# Altium PCB Laser_Driver.PcbDoc
Units mil, origin at the board's own origin, x right, y up, seen from the top; angles counter-clockwise.
Board outline 870.08 x 837.6 mil, 2 copper layers (Top Layer, Bottom Layer); 11 components, 9 nets, 33 pads, 25 vias.
Unrouted connection lines stored in the file: 8.
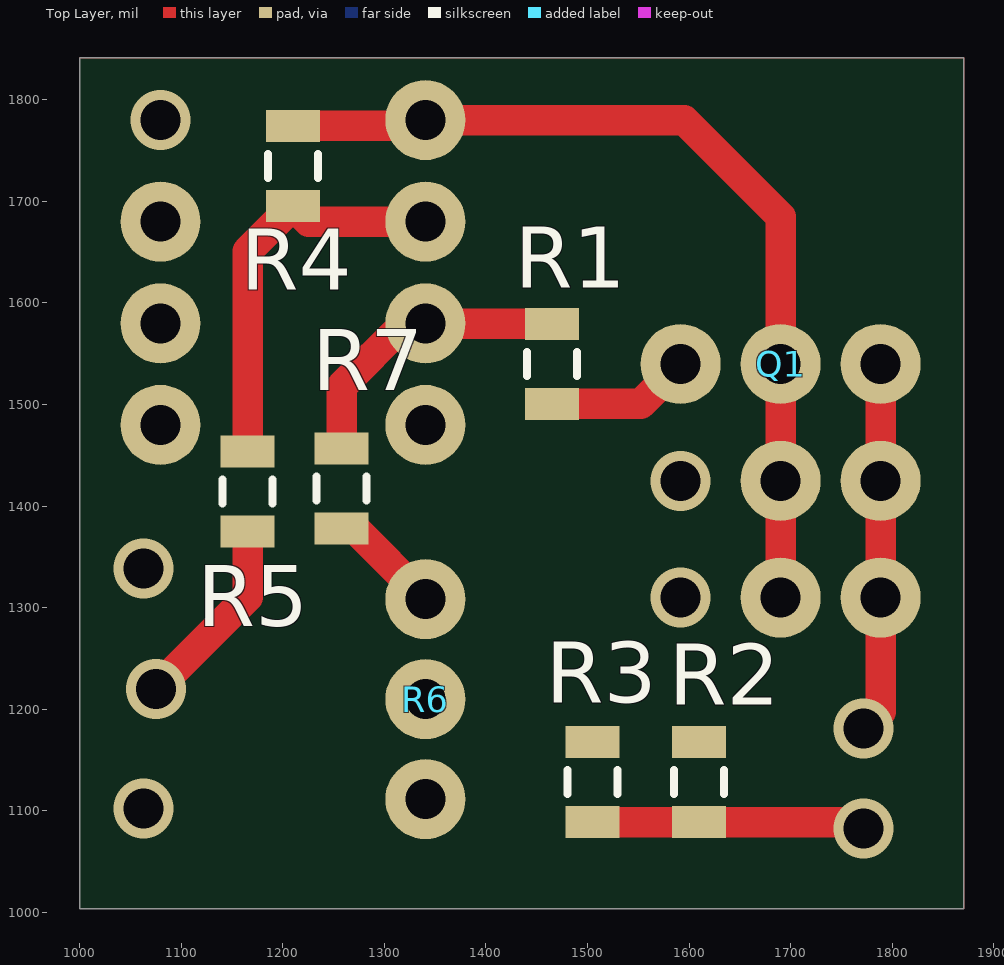
[diagram p0: Top Layer view]
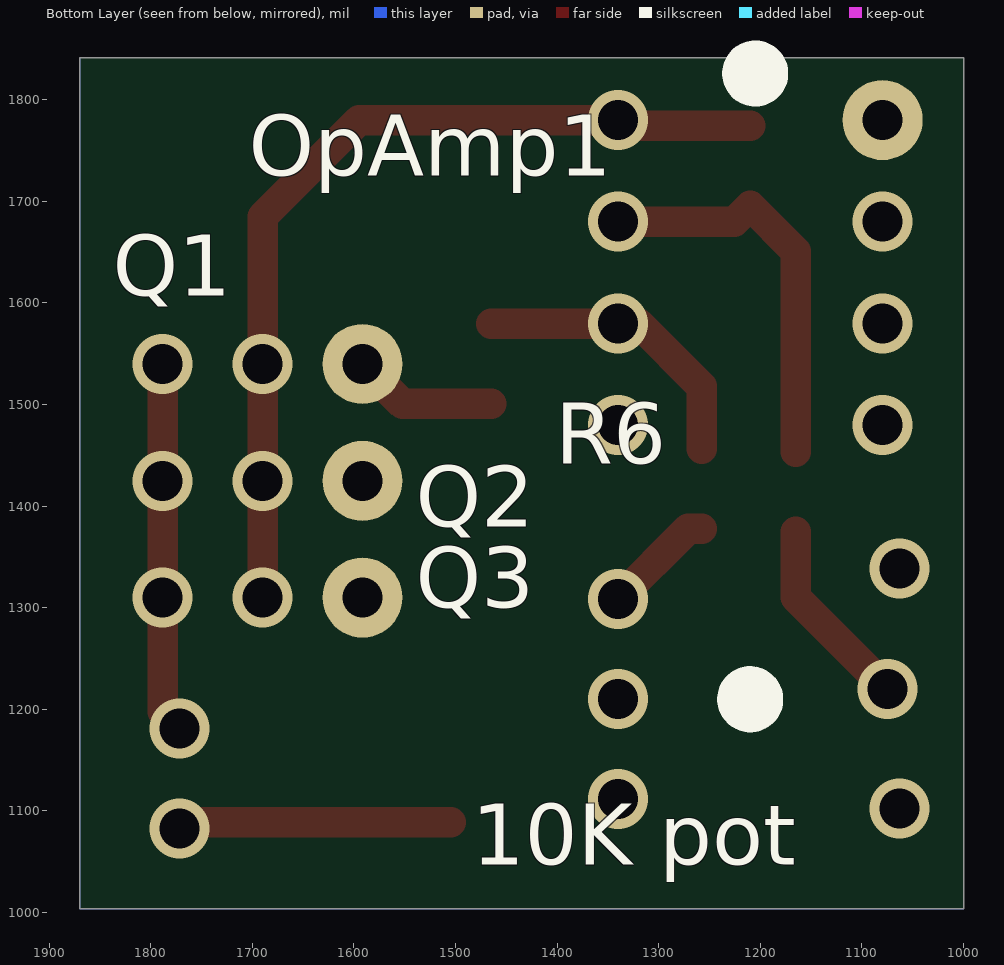
[diagram p1: Bottom Layer view, seen from below]

## Layer stack, top to bottom
Top Solder: solder mask 0.4, Solder Resist, Dk 3.5
Top Layer: signal copper 1.4
Dielectric 1: dielectric 12.6, FR-4, Dk 4.8
Bottom Layer: signal copper 1.4
Bottom Solder: solder mask 0.4, Solder Resist, Dk 3.5

## Board outline
1000,1003.94 1000,1841.54 1870.08,1841.54 1870.08,1003.94

## Design rules (kind name [scope] priority, off if disabled: settings)
Clearance [All] p1: gap=10
PlaneClearance [All] p1: clearance=40
PlaneConnect [All] p1: planeconnectstyle=Direct reliefexpansion=20 reliefentries=4 reliefconductorwidth=10 reliefairgap=10
PolygonConnect [All] p1: connectstyle=Direct reliefconductorwidth=10 reliefentries=4 polygonreliefangle="90 Angle" airgapwidth=10
RoutingVias [All] p1: holewidth=30 width=50 viastyle="Through Hole" minholewidth=30 minwidth=50 maxholewidth=30 maxwidth=50
SolderMaskExpansion [All] p1: expansion=4
Width [All] p1: maxlimit=50 minlimit=10 preferedwidth=10 minimp=50.000000 maximp=50.000000 favimp=50.000000
27 further rules are at their usual default settings.

## Components (designator, comment, footprint, x,y, rotation, side; value= is the part's Value field where it differs from the comment)
OpAmp1 "LF-353N" "6 pin socket" 1210,1630 r270 bottom
Q1 "" "NPN SOCKET"#1 1690,1540 r0 bottom
Q2 "" "NPN SOCKET"#2 1690,1425 r0 bottom
Q3 "" "NPN SOCKET"#2 1690,1310 r0 bottom
R1 "Resistor 22K 0804" "SMT 0805 (2012)" 1465,1540 r90 top
R2 "Resistor 22K 0804" "SMT 0805 (2012)" 1609.61,1128.46 r90 top
R3 "Resistor 22K 0804" "SMT 0805 (2012)" 1504.61,1128.46 r90 top
R4 "Resistor 22K 0804" "SMT 0805 (2012)" 1210,1735 r90 top
R5 "Resistor 56K Ohm" "SMT 0805 (2012)" 1165.35,1414.37 r270 top
R6 "10K pot" "pot socket" 1210,1210 r270 bottom
R7 "Resistor 500 0804" "SMT 0805 (2012)" 1257.87,1417.32 r270 top

## Footprints (in the part's own frame and the unit in brackets; to place one, negate y for a bottom-side part, rotate by r counter-clockwise, add the part's x,y. Pads: shape width x height; smd on the part's side, far side on the other; paste and mask are expansions set on the pad)
"6 pin socket" [mm] "6 pin socket"
  round 2 smd far side: 1(-3.81,-3.31) 2(-1.27,-3.31) 3(1.27,-3.31) 4(3.81,-3.31) 5(3.81,3.31) 6(1.27,3.31) 7(-1.27,3.31)
  round 2 smd: 8(-3.81,3.31)
  silkscreen extent -5.3,-0.2 -4.65,0.45, body extent -5,-5 5,5, height 8.5
"NPN SOCKET"#1 [mm] "NPN socket"
  round 2 smd far side: 1(-2.5,0) 2(0,0) 3(2.5,0)
  body extent -3.8,-1.3 3.8,1.3, height 14
"NPN SOCKET"#2 [mm] "NPN socket"
  round 2 smd: 1(-2.5,0)
  round 2 smd far side: 2(0,0) 3(2.5,0)
  body extent -3.8,-1.3 3.8,1.3, height 14
"pot socket" [mm] "pot socket"
  round 2 smd far side: 1(-2.5,-3.31) 2(0,-3.31) 3(2.5,-3.31)
  silkscreen extent -0.33,-0.33 0.33,0.33, body extent -5,-5 5,5, height 14
"SMT 0805 (2012)" [mm] "SMT 0805(2012)"
  rect 0.8x1.35 smd: 1(-1,0) 2(1,0)
  silkscreen extent -0.3,-0.63 0.3,0.63, body extent -1,-0.63 1,0.63, height 0.8

## Part data
OpAmp1: library part LF353NFS-ND
Q1 Q2 Q3: library part MMBT3904, "NPN Bipolar Transistor"
R1 R2 R3 R4: "Resistor 22K 1% Surface Mount 0804"
R5: library part "Resistor 56k Ohm 0804", "Resistor 56K 0804"
R7: library part "Resistor 22K 0804", "Resistor 22K 1% Surface Mount 0804"

## Free pads (board coordinates)
  round 78.74 smd far side: 1(1591.57,1540)

## Via types
v1: diameter 59.06, hole 39.37, Top Layer to Bottom Layer, 25 vias

## Nets (pads, with @x,y where several pads share a name; then routed paths per layer and width w, separated by ;. In a path a pad name is that pad's centre, name@x,y a point inside that pad or via, vN(x,y) a via of type N, cw(c..) or ccw(c..) an arc to the next point about the centre after c; other vN are vias at no path point)
12V: OpAmp1.8 pad.1 Q1.1 Q2.1 Q3.1 R1.1 | length 142.9
  Top Layer w30: R1.1 1552.2,1500.63 v1(1591.57,1540)
  other v1: 1591.57,1310 1062.99,1338.58 1591.57,1425 1079.68,1780
GND: OpAmp1.4 R2.2 R3.2 R6.2
  other v1: 1062.99,1102.36 1340.32,1210 1340.32,1480
IN: R5.2 | length 192.4
  Top Layer w30: v1(1075,1220) 1165.35,1310.35 R5.2
LASER_IN: Q1.3 Q2.3 Q3.3 | length 365.8
  Top Layer w30: v1(1771.65,1181.1) 1788.43,1197.87 v1(1788.43,1310) v1(1788.43,1425) v1(1788.43,1540)
LASER_OUT: R2.1 R3.1 | length 269.7
  Top Layer w30: R3.1 R2.1 1765.24,1089.09 v1(1771.65,1082.68)
NetOpAmp1_1: OpAmp1.1 Q1.2 Q2.2 Q3.2 R4.2 | length 896.7
  Top Layer w30: R4.2 1334.69,1774.37 v1(1340.32,1780) 1595,1780 1690,1685 v1(1690,1540) v1(1690,1425) v1(1690,1310)
NetOpAmp1_2: OpAmp1.2 R4.1 R5.1 | length 397.2
  Top Layer w30: R5.1 1165.35,1650.98 R4.1 1225.63,1680 v1(1340.32,1680)
NetOpAmp1_3: OpAmp1.3 R1.2 R7.1 | length 294.3
  Top Layer w30: R7.1 1257.87,1517.87 1320,1580 v1(1340.32,1580) 1340.94,1579.37 R1.2
NetR6_1: R6.1 R7.2 | length 111.2
  Top Layer w30: R7.2 1270.79,1377.95 v1(1340.32,1308.43)
pads on no net: OpAmp1.5 OpAmp1.6 OpAmp1.7 R6.3
copper on no net:
  other v1: 1340.32,1111.57 1079.68,1480 1079.68,1580 1079.68,1680

## Polygon pours and split planes (outlines as drawn)
GND on Top Layer "Top Layer-No Net" (solid, shelved, pour order 11): 1000,1003.94 1000,1841.54 1870.08,1841.54 1870.08,1003.94
12V on Bottom Layer "Top Layer-No Net1" (solid, shelved, pour order 13): 1000,1003.94 1000,1841.54 1870.08,1841.54 1870.08,1003.94

## Silkscreen, mask and mechanical layers (free items; w line width, h text height)
Mechanical 13:
  lines w10: 1000,1003.94 1870.08,1003.94 1870.08,1841.54 1091.54,1841.54 1000,1841.54 1000,1003.94